# EAGLE board xr_vco_components_route1 (EAGLE 7.3.0)
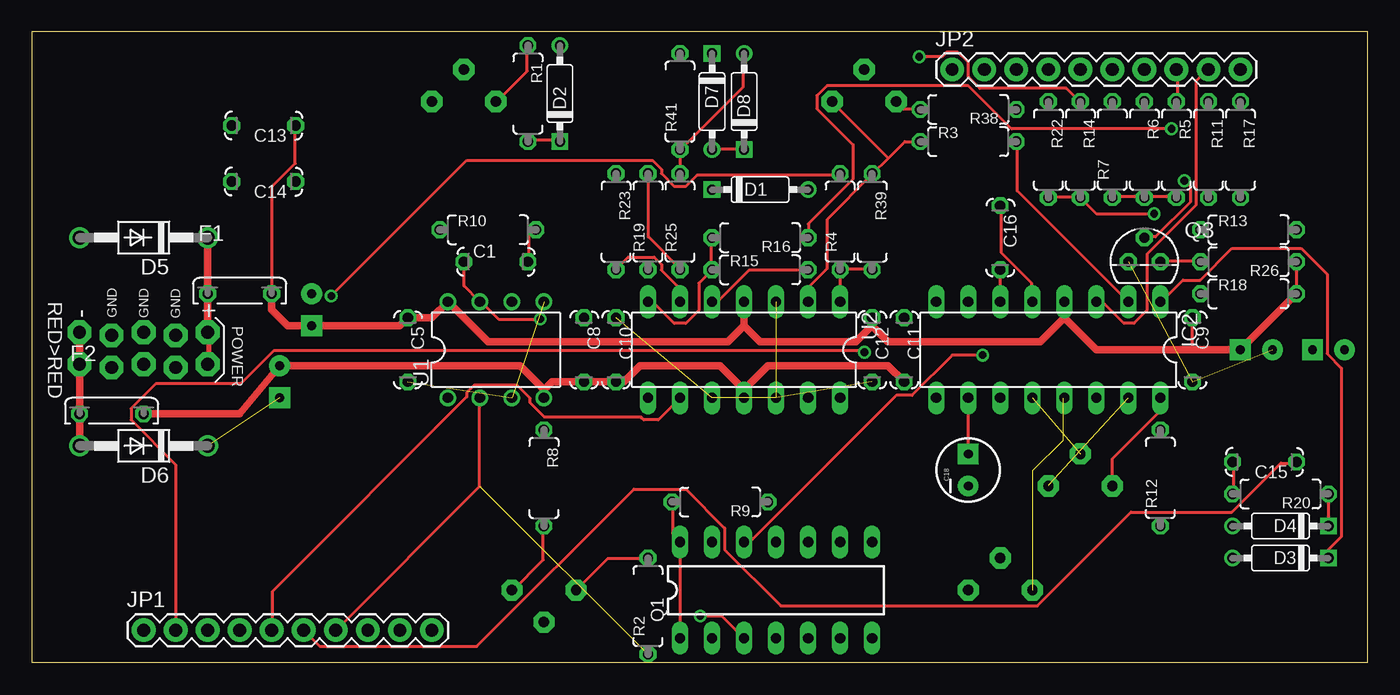
[diagram p0: board, top side]
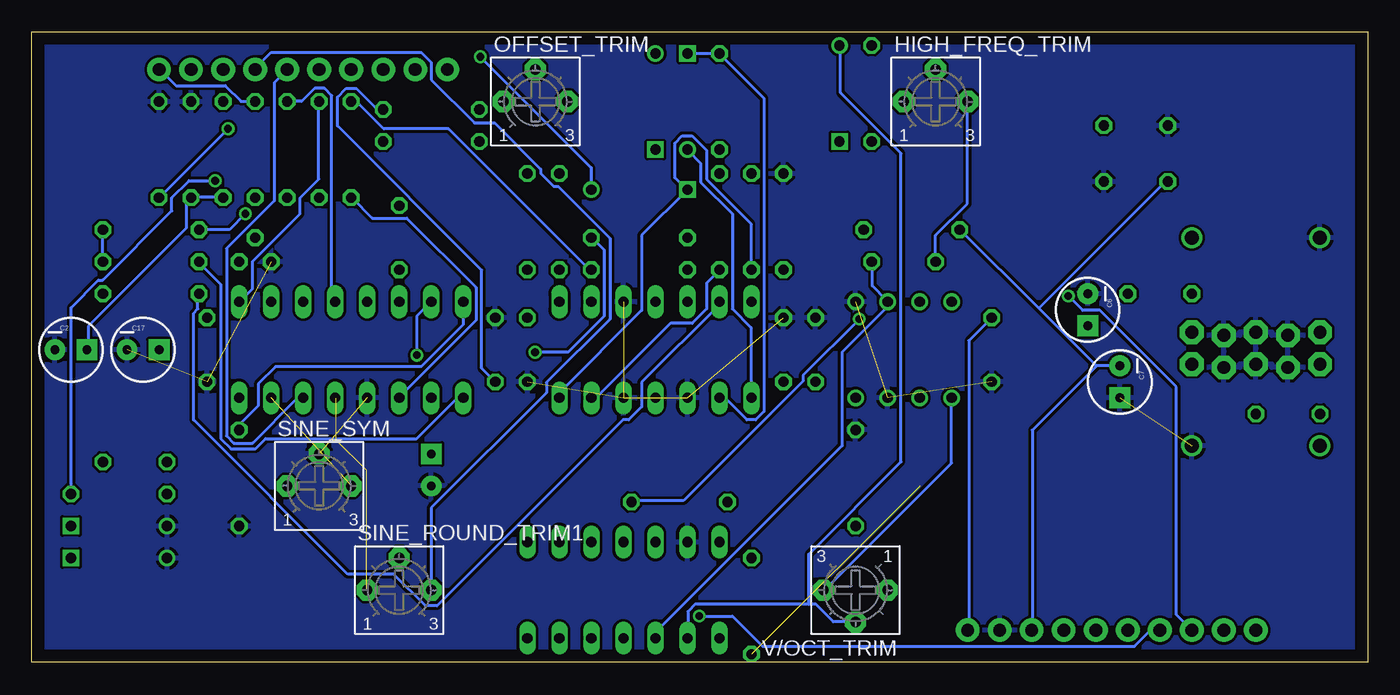
[diagram p1: board, bottom side, seen from below]

Size 106 x 50 mm. Coordinates in mm from the lower left corner, seen from the top.
Outline: 0,0 106,0 106,50 0,50 0,0
Copper layers (1*16): Top 0.035mm / dielectric 1.5mm / Bottom 0.035mm
Design rules "default": minimum track width 10mil, minimum drill 24mil, track to track 8mil, track to pad 8mil, pad to pad 8mil, via to via 8mil, smd to smd 8mil, copper to edge 40mil, drill to drill 8mil, minimum pad ring 10mil, minimum via ring 8mil, stop-mask expansion 4mil, vias tented up to drill 0mil, thermal gap 10mil
Net classes: 1 power: width 0.406 mm; 2 ground: width 0.305 mm

## Footprints (pad centres in the part's own frame; a part is rotated, then mirrored left to right if it is on the bottom)
C050-024X044 = drill 0.813 octagon: 1 -2.54,0; 2 2.54,0
CPOL-RADIAL-10UF-25V = drill 0.7 pad 1.651 square: 1 1.27,0 | drill 0.7 pad 1.651: 2 -1.27,0
DO35-7 = drill 0.813: A 3.81,0 | drill 0.813 square: C -3.81,0
DO41-10 = drill 1.118: A 5.08,0; C -5.08,0
C050H075X075 = drill 0.813 octagon: 1 -2.54,0; 2 2.54,0
BOURNS_3362P_TRIMMER = drill 0.813 pad 1.676 octagon: 1 -2.54,0; 2 0,2.54; 3 2.54,0
DIL16 = drill 0.813 long: 1 -8.89,-3.81; 2 -6.35,-3.81; 3 -3.81,-3.81; 4 -1.27,-3.81; 5 1.27,-3.81; 6 3.81,-3.81; 7 6.35,-3.81; 8 8.89,-3.81; 9 8.89,3.81; 10 6.35,3.81; 11 3.81,3.81; 12 1.27,3.81; 13 -1.27,3.81; 14 -3.81,3.81; 15 -6.35,3.81; 16 -8.89,3.81
1X10 = drill 1.016 pad 1.88: 1 0,0; 2 2.54,0; 3 5.08,0; 4 7.62,0; 5 10.16,0; 6 12.7,0; 7 15.24,0; 8 17.78,0; 9 20.32,0; 10 22.86,0
DIL14 = drill 0.813 long: 1 -7.62,-3.81; 2 -5.08,-3.81; 3 -2.54,-3.81; 4 0,-3.81; 5 2.54,-3.81; 6 5.08,-3.81; 7 7.62,-3.81; 8 7.62,3.81; 9 5.08,3.81; 10 2.54,3.81; 11 0,3.81; 12 -2.54,3.81; 13 -5.08,3.81; 14 -7.62,3.81
TO92D = drill 0.813 octagon: B 0,1.905; C 1.27,0; E -1.27,0
7MM_RESISTOR = drill 0.813 octagon: 1 -3.81,0; 2 3.81,0
EURO_PWR_HEADER_LOCK = drill 1.016 pad 1.88 octagon: GND1 -2.54,1.143; GND2 -2.54,-1.397; GND3 0,1.397; GND4 0,-1.143; GND5 2.54,1.143; GND6 2.54,-1.397; NEG1 -5.08,1.397; NEG2 -5.08,-1.143; POS1 5.08,1.397; POS2 5.08,-1.143
DIL08 = drill 0.813 pad 1.27: 1 -3.81,-3.81; 2 -1.27,-3.81; 3 1.27,-3.81; 4 3.81,-3.81; 5 3.81,3.81; 6 1.27,3.81; 7 -1.27,3.81; 8 -3.81,3.81

## Placement (x,y rotation side)
C1  100pf  [C050-024X044]  36.83,31.75 0 top
C2  10uf  [CPOL-RADIAL-10UF-25V]  102.87,24.77 0 bottom
C5  100n  [C050-024X044]  29.84,24.77 270 top
C6  10uf  [CPOL-RADIAL-10UF-25V]  22.23,27.94 270 bottom
C7  10uf  [CPOL-RADIAL-10UF-25V]  19.68,22.23 270 bottom
C8  100n  [C050-024X044]  43.81,24.77 270 top
C9  100n  [C050-024X044]  92.08,24.77 270 top
C10  100n  [C050-024X044]  46.35,24.77 270 top
C11  100n  [C050-024X044]  69.22,24.77 270 top
C12  100n  [C050-024X044]  66.67,24.77 270 top
C13  100n  [C050-024X044]  18.41,42.55 180 top
C14  100n  [C050-024X044]  18.41,38.1 180 top
C15  470pf  [C050-024X044]  97.79,15.88 180 top
C16  0.047uf  [C050-024X044]  76.83,33.66 270 top
C17  4.7uf  [CPOL-RADIAL-10UF-25V]  97.16,24.77 0 bottom
C18  4.7uf  [CPOL-RADIAL-10UF-25V]  74.3,15.24 90 top
D1  1N4148  [DO35-7]  57.78,37.47 0 top
D2  1N4148  [DO35-7]  41.91,45.09 90 top
D3  1N4148  [DO35-7]  99.06,8.26 180 top
D4  1N4148  [DO35-7]  99.06,10.79 180 top
D5  1N4001  [DO41-10]  8.89,33.66 180 top
D6  1N4001  [DO41-10]  8.89,17.14 180 top
D7  1N4148  [DO35-7]  53.98,44.45 270 top
D8  1N4148  [DO35-7]  56.52,44.45 90 top
F1  FUSE  [C050H075X075]  16.51,29.21 0 top
F2  FUSE  [C050H075X075]  6.35,19.68 0 top
HIGH_FREQ_TRIM  1M  [BOURNS_3362P_TRIMMER]  34.29,44.45 0 bottom
IC2  [DIL16]  80.64,24.77 180 top
JP1  M10"  [1X10]  8.89,2.54 0 top
JP2  M10"  [1X10]  73.03,46.99 0 top
OFFSET_TRIM  50k  [BOURNS_3362P_TRIMMER]  66.04,44.45 0 bottom
Q1  THAT300P  [DIL14]  59.05,5.71 0 top
Q3  2N3904  [TO92D]  88.27,31.75 0 top
R1  47k  [7MM_RESISTOR]  39.37,45.09 270 top
R2  2k  [7MM_RESISTOR]  48.9,4.45 90 top
R3  82k  [7MM_RESISTOR]  74.3,41.27 0 top
R4  1k  [7MM_RESISTOR]  64.14,34.92 90 top
R5  11k  [7MM_RESISTOR]  90.81,40.64 270 top
R6  20k  [7MM_RESISTOR]  88.27,40.64 270 top
R7  5.6k  [7MM_RESISTOR]  85.72,40.64 90 top
R8  390R  [7MM_RESISTOR]  40.64,14.61 270 top
R9  4.7k  [7MM_RESISTOR]  54.61,12.7 180 top
R10  1.2m  [7MM_RESISTOR]  36.2,34.29 0 top
R11  5.6k  [7MM_RESISTOR]  93.34,40.64 270 top
R12  1k  [7MM_RESISTOR]  89.53,14.61 90 top
R13  4.7k  [7MM_RESISTOR]  96.52,34.29 0 top
R14  10k  [7MM_RESISTOR]  83.19,40.64 270 top
R15  2.2M  [7MM_RESISTOR]  57.78,31.11 0 top
R16  3k  [7MM_RESISTOR]  57.78,33.66 180 top
R17  1.8k  [7MM_RESISTOR]  95.89,40.64 270 top
R18  10k  [7MM_RESISTOR]  96.52,29.21 0 top
R19  10k  [7MM_RESISTOR]  48.9,34.92 90 top
R20  100k  [7MM_RESISTOR]  99.06,13.34 180 top
R22  2.2k  [7MM_RESISTOR]  80.64,40.64 270 top
R23  10k  [7MM_RESISTOR]  46.35,34.92 270 top
R25  10k  [7MM_RESISTOR]  51.44,34.92 90 top
R26  4.7k  [7MM_RESISTOR]  96.52,31.75 180 top
R38  150k  [7MM_RESISTOR]  74.3,43.81 180 top
R39  200k  [7MM_RESISTOR]  66.67,34.92 270 top
R41  220k  [7MM_RESISTOR]  51.44,44.45 90 top
SINE_ROUND_TRIM1  500 Ohm  [BOURNS_3362P_TRIMMER]  76.83,5.71 0 bottom
SINE_SYM  25k  [BOURNS_3362P_TRIMMER]  83.19,13.97 0 bottom
SV1  EURO_POWER_HEADERLOCK_PADS  [EURO_PWR_HEADER_LOCK]  8.89,24.77 0 top
U1  LF442N  [DIL08]  36.83,24.77 0 top
U2  TL074P  [DIL14]  56.52,24.77 180 top
V/OCT_TRIM  100R  [BOURNS_3362P_TRIMMER]  40.64,5.71 180 bottom

## Library data of the parts
C1 C5 C8-C16 F1 F2 = TomW
C2 C6 C7 C17 C18 = SparkFun-Passives
D1-D4 D7 D8 HIGH_FREQ_TRIM OFFSET_TRIM R1-R20 R22 R23 R25 R26 R38 R39 R41 SINE_ROUND_TRIM1 SINE_SYM SV1 V/OCT_TRIM = MusicThingModular
D5 D6 = diode
IC2 = exar; OC_FARNELL: unknown; OC_NEWARK: unknown
JP1 JP2 = SparkFun-Connectors
Q1 = that-corp
Q3 = transistor-small-signal
U1 U2 = linear

## Nets
+12V: C5.1 C6.1 C9.1 C12.1 C13.1 C17.1 F1.2 IC2.4 JP1.10 R7.2 R13.2 R18.2 R26.1 U1.8 U2.4
+12V_INLET [power]: D5.C F1.1 SV1.POS1 SV1.POS2
-12V: C7.2 C8.2 C10.2 C11.2 C14.2 F2.2 JP1.8 R10.1 R38.1 U1.4 U2.11
-12V_INLET [power]: D6.A F2.1 SV1.NEG1 SV1.NEG2
CATH_D4: D1.C R19.1 U2.14
GND: C2.2 C5.2 C6.2 C7.1 C8.1 C9.2 C10.1 C11.1 C12.2 C13.2 C14.1 C17.2 C18.2 D3.A D4.A D5.A D6.C IC2.12 JP1.9 Q1.13 Q3.E R8.1 R11.1 R12.1 R17.1 R23.1 SINE_SYM.2 SV1.GND1 SV1.GND2 SV1.GND3 SV1.GND4 SV1.GND5 SV1.GND6 U1.3 U1.5 U2.3 U2.10 U2.12
LIN_FM_CV: C1.2 JP1.4 Q1.3 R10.2 U1.6
N$1: IC2.7 Q1.12
N$2: D2.C R1.2
N$3: HIGH_FREQ_TRIM.1 R1.1
N$5: IC2.2 R3.2
N$7: R2.2 U1.1 V/OCT_TRIM.3
N$8: OFFSET_TRIM.3 R3.1 R39.1 U2.2
N$9: R8.2 V/OCT_TRIM.1
N$10: D2.A Q1.2 V/OCT_TRIM.2
N$11: Q1.1 Q1.14 R9.2
N$12: OFFSET_TRIM.1 R38.2
N$13: R4.1 R39.2 U2.1
N$15: C1.1 HIGH_FREQ_TRIM.3 R9.1 U1.7
N$16: C2.1 R5.2 R6.2 R7.1 R11.2
N$17: IC2.16 SINE_SYM.1
N$20: IC2.13 SINE_ROUND_TRIM1.1
N$21: IC2.15 SINE_SYM.3
N$22: IC2.8 R12.2
N$23: R18.1 R23.2 U2.6
N$24: R15.1 R16.2 U2.7
N$25: R19.2 R25.1 U2.13
N$26: R15.2 R22.1 U2.5
N$27: D1.A D3.C IC2.1 R14.1
N$28: C15.2 R20.2
N$29: D4.C Q3.B R20.1
N$30: IC2.11 R13.1 R14.2 R22.2
N$31: IC2.9 Q3.C R26.2
N$32: C16.2 IC2.6
N$33: C16.1 IC2.5
N$34: C18.1 IC2.10
N$35: D7.A D8.C U2.8
N$36: D8.A R25.2 R41.1
PITCH_CV: JP1.7 R2.1 U1.2
SINE_TRI_OUT: JP1.3 R4.2
SKEW_IN: D7.C JP1.5 R41.2 U2.9
SQR_OUT: JP1.2 R16.1 R17.2
SW_1: JP2.10 R6.1
SW_2: IC2.3 JP2.9
SW_3: JP2.8 R5.1
SW_4: JP2.7 SINE_ROUND_TRIM1.3
SW_5: IC2.14 JP2.6
SYNC_IN: C15.1 JP1.6

## Tracks (layer width: path | path; a pad name or v marks a point on that pad's centre or on a via)
+12V
  Top 0.254: U2.4 56.58,28.57 56.58,28.23 56.52,27.94 | 92.01,24.77 92.01,27.2 C9.1 | C13.1 20.92,42.52 20.92,39.55 19.09,37.72 19.09,29.49 F1.2 | R26.1 100.36,31.66 100.36,29.49 R18.2
  Top 0.61: F1.2 19.05,27.94 20.32,26.67 C6.1 29.21,26.67 C5.1 31.75,27.3 U1.8 36.2,25.4 55.24,25.4 56.52,26.67 | 56.52,27.94 56.52,26.67 | 56.52,26.67 57.78,25.4 65.41,25.4 66.67,26.67 | 66.67,26.67 C12.1 | 66.67,26.67 67.94,25.4 80.01,25.4 81.92,27.3 | IC2.4 81.92,27.3 | 81.92,27.3 84.45,24.77 92.01,24.77 C17.1 R18.2
  Bottom 0.254: R7.2 85.72,44.46 84.58,44.46 83.55,45.49 82.75,45.49 82.18,44.92 82.18,28.8 81.95,28.57 IC2.4 | R13.2 100.36,34.29 100.36,31.77 R26.1 | C5.1 31.66,25.49 31.66,2.63 JP1.10
+12V_INLET
  Top 0.406: SV1.POS2 14.06,23.66 14.06,25.95 SV1.POS1
  Top 0.61: SV1.POS1 F1.1 D5.C
-12V
  Top 0.254: U2.11 56.58,21.03 56.58,21.37 56.52,21.59
  Top 0.61: F2.2 16.51,19.68 C7.2 38.73,23.5 40.64,21.59 | U1.4 40.64,21.59 | 40.64,21.59 41.27,22.23 C8.2 C10.2 46.99,22.23 48.26,23.5 54.61,23.5 56.52,21.59 58.42,23.5 67.94,23.5 C11.2
  Bottom 0.254: 21.6,23.55 19.77,23.55 C7.2 | 26.12,28.06 32.35,34.29 R10.1 | 26.12,28.06 21.6,23.55 | 26.12,28.06 16.12,38.06 15.89,38.06 C14.2 | R38.1 78.18,43.89 78.64,43.89 80.24,45.49 81.04,45.49 81.72,44.81 81.72,42.52 70.29,31.09 70.29,23.32 69.27,22.29 C11.2 | JP1.8 26.63,2.63 26.63,18.4 21.6,23.43 21.6,23.55
-12V_INLET
  Top 0.406: SV1.NEG2 3.89,23.66 3.81,23.66
  Top 0.61: SV1.NEG1 3.81,23.66 SV1.NEG2 F2.1 D6.A
CATH_D4
  Bottom 0.254: U2.14 64.12,21.03 64.12,21.37 57.61,27.89 57.61,33.83 D1.C 54.06,37.49 54.98,38.41 54.98,41.15 54.41,41.72 53.61,41.72 52.46,40.58 52.46,38.29 48.92,34.75 48.92,31.2 R19.1
GND  (10 unrouted)
  pour Bottom: -0.64,50.8 -0.64,-0.64 106.68,-0.64 106.68,0 106.68,50.8
LIN_FM_CV  (via drill 0.61)
  Top 0.254: R10.2 39.43,33.72 39.43,31.77 C1.2 | v53.03,3.66 54.75,3.66 56.46,1.94 Q1.3
  Bottom 0.254: Q1.3 56.46,1.94 56.46,2.4 41.72,17.14 41.72,24.57 38.18,28.12 38.18,28.57 U1.6 38.18,28.69 39.32,29.83 39.32,31.66 C1.2 | v53.03,3.66 50.41,3.66 48.01,1.26 18.52,1.26 17.26,2.52 16.57,2.52 JP1.4
N$1  (via drill 0.61)
  Top 0.254: v75.44,24.35 73.04,24.35 69.84,21.14 68.58,21.14 57.04,9.6 56.58,9.6 Q1.12
  Bottom 0.254: v75.44,24.35 75.44,27.43 IC2.7
N$2
  Top 0.254: R1.2 39.43,41.38 41.83,41.38 D2.C
N$3
  Top 0.254: R1.1 39.32,48.81 39.32,46.86 36.92,44.46 HIGH_FREQ_TRIM.1
N$5
  Top 0.254: R3.2 78.18,41.26 78.18,37.38 IC2.2
N$7
  Top 0.254: R2.2 48.81,8.23 45.72,8.23 43.2,5.71 V/OCT_TRIM.3
  Bottom 0.254: U1.1 33.03,20.92 33.03,15.77 43.09,5.71 V/OCT_TRIM.3
N$8
  Top 0.254: U2.2 61.61,28.57 61.61,29.72 63.09,31.2 63.09,35.09 66.64,38.63 R39.1 66.75,38.75 67.95,39.95 | 67.95,39.95 69.27,41.26 70.41,41.26 R3.1 | 67.95,39.95 63.55,44.35 OFFSET_TRIM.3
N$9
  Top 0.254: R8.2 40.58,10.74 40.58,8.12 38.18,5.71 V/OCT_TRIM.1
N$10
  Bottom 0.254: 44.35,4.57 43.78,4.57 42.41,3.2 40.69,3.2 V/OCT_TRIM.2 | 44.35,4.57 53.38,4.57 53.95,4 53.95,1.94 Q1.2 | 44.35,4.57 44.35,8.57 37.03,15.89 37.03,40.35 41.83,45.15 41.83,48.81 D2.A
N$11
  Top 0.254: Q1.1 Q1.14 51.44,9.6 50.86,10.17 50.86,12.69 R9.2
N$12
  Top 0.254: R38.2 70.41,43.89 69.04,43.89 68.58,44.35 OFFSET_TRIM.1
N$13
  Top 0.254: U2.1 64.12,28.57 64.12,31.09 R4.1 64.24,31.2 66.64,31.2 R39.2
N$15  (via drill 0.61)
  Top 0.254: C1.1 34.29,29.83 35.55,28.57 U1.7 35.66,28.57 37.03,27.2 v40.35,27.2
  Bottom 0.254: v40.35,27.2 44.81,22.75 44.81,22.29 54.29,12.8 58.41,12.8 R9.1 | C1.1 34.29,33.83 31.77,36.35 31.77,44.35 HIGH_FREQ_TRIM.3
N$16
  Top 0.254: R7.1 85.72,36.92 88.24,36.92 R6.2 88.35,36.92 90.75,36.92 R5.2
  Bottom 0.254: R5.2 90.87,36.92 93.27,36.92 R11.2 93.38,36.8 93.73,36.46 93.73,34.4 101.5,26.63 101.5,24.8 C2.1
N$17
  Top 0.254: SINE_SYM.1 85.72,16.12 89.5,19.89 89.5,20.92 IC2.16
N$20  (3 unrouted)
  Top 0.254: 81.84,20.92 IC2.13 | 79.44,5.71 SINE_ROUND_TRIM1.1
N$21  (2 unrouted)
N$22
  Bottom 0.254: R12.2 89.5,18.52 89.5,18.86 88.01,20.34 88.01,22.06 86.64,23.43 75.09,23.43 71.78,26.75 71.78,28.57 IC2.8
N$23
  Top 0.254: U2.6 51.44,29.6 49.95,31.09 49.95,31.55 49.38,32.12 47.32,32.12 46.41,31.2 R23.2
  Bottom 0.254: U2.6 51.44,28.35 57.61,22.17 57.61,20.23 58.64,19.2 59.09,19.2 73.84,4.46 74.75,4.46 77.27,6.97 80.92,6.97 93.15,19.2 93.15,27.66 92.81,28 92.81,29.15 R18.1
N$24
  Top 0.254: U2.7 49.26,28.57 50.98,26.86 51.89,26.86 52.92,27.89 52.92,30.06 R15.1 53.95,31.2 53.95,33.6 R16.2
N$25
  Top 0.254: R19.2 48.92,38.63 48.92,33.72 51.44,31.2 R25.1
  Bottom 0.254: U2.13 61.49,21.03 61.15,21.03 55.32,26.86 53.61,26.86 52.46,28 52.46,30.06 51.44,31.09 R25.1
N$26
  Top 0.254: U2.5 54.41,28.57 56.92,31.09 61.49,31.09 R15.2
  Bottom 0.254: R22.1 80.58,44.35 80.12,44.35 78.07,42.29 72.92,42.29 61.84,31.2 61.61,31.2 R15.2
N$27  (via drill 0.61)
  Top 0.254: v70.41,48.01 72.24,48.01 72.58,48.35 73.5,48.35 74.3,47.55 74.3,46.41 75.21,45.49 82.07,45.49 83.1,44.46 R14.1 | D3.C 102.87,8.91 103.9,9.94 103.9,23.32 102.76,24.46 102.76,30.75 100.7,32.8 95.21,32.8 92.7,30.29 91.33,30.29 89.61,28.57 IC2.1
  Bottom 0.254: v70.41,48.01 61.61,39.2 61.61,37.49 D1.A | R14.1 83.21,44.35 83.21,38.29 84.7,36.8 84.7,35.55 88.47,31.77 88.47,29.6 89.5,28.57 IC2.1
N$28
  Top 0.254: R20.2 95.33,13.37 95.33,15.77 C15.2
N$29  (via drill 0.61)
  Top 0.254: 88.24,33.72 Q3.B 88.35,33.72 89.15,33.72 91.9,36.46 91.9,37.72 v91.44,38.18 | R20.1 D4.C
  Bottom 0.254: v91.44,38.18 93.5,38.18 94.87,36.8 94.87,35.78 100.36,30.29 100.7,30.29 102.87,28.12 R20.1
N$30  (via drill 0.61)
  Top 0.254: R22.2 80.7,36.92 83.1,36.92 R14.2 84.47,35.55 v89.04,35.55
  Bottom 0.254: IC2.11 76.81,21.03 70.75,27.09 70.75,29.72 76.24,35.2 78.98,35.2 80.58,36.8 R22.2 | R13.1 90.3,34.29 v89.04,35.55
N$31
  Top 0.254: Q3.C 89.61,31.77 92.7,31.77 R26.2
  Bottom 0.254: IC2.9 71.78,20.92 72.24,20.92 75.44,17.72 87.44,17.72 88.24,16.92 90.18,16.92 90.98,17.72 90.98,29.95 92.7,31.66 R26.2
N$32
  Top 0.254: IC2.6 76.81,28.57 76.81,31.09 C16.2
N$33
  Top 0.254: C16.1 76.92,36.12 76.92,32.46 79.32,30.06 79.32,28.57 IC2.5
N$34
  Top 0.254: C18.1 IC2.10
N$35
  Top 0.254: D8.C 56.46,40.69 54.06,40.69 D7.A
  Bottom 0.254: U2.8 48.92,21.03 48.92,26.52 50.41,28 50.41,35.55 52.92,38.06 52.92,39.55 53.95,40.58 D7.A
N$36
  Top 0.254: R25.2 R41.1 51.55,40.69 56.46,45.61 56.46,48.23 D8.A
PITCH_CV  (1 unrouted)
  Top 0.254: U1.2 35.55,20.92 35.55,13.95 24.23,2.63 JP1.7
SINE_TRI_OUT  (via drill 0.61)
  Top 0.254: v23.77,29.03 34.52,39.78 49.26,39.78 49.95,39.09 49.95,38.75 50.98,37.72 51.89,37.72 52.81,38.63 64.12,38.63 R4.2
  Bottom 0.254: v23.77,29.03 22.63,27.89 21.26,27.89 15.2,21.83 15.2,3.77 JP1.3
SKEW_IN
  Top 0.254: JP1.5 19.09,2.63 19.09,5.6 34.52,21.03 34.52,21.37 35.09,21.95 38.52,21.95 39.55,20.92 39.55,20.57 40.69,19.43 48.35,19.43 48.58,19.2 49.72,19.2 51.44,20.92 U2.9
  Bottom 0.254: U2.9 51.44,20.92 50.98,20.92 49.26,19.2 48.58,19.2 47.89,19.89 47.89,44.69 51.44,48.23 R41.2 51.55,48.23 53.95,48.23 D7.C
SQR_OUT  (via drill 0.61)
  Top 0.254: v90.41,42.29 77.72,42.29 74.3,45.72 63.09,45.72 62.29,44.92 62.29,43.89 65.15,41.03 65.15,38.29 61.61,34.75 61.61,33.72 R16.1 | JP1.2 11.43,15.66 7.89,19.2 7.89,20.12 9.83,22.06 16.57,22.06 19.2,24.69 65.95,24.69 v66.06,24.57
  Bottom 0.254: v90.41,42.29 95.78,36.92 R17.2 | v66.06,24.57 63.44,24.57 60.58,27.43 60.58,32.69 61.49,33.6 R16.1
SW_1
  Bottom 0.254: R6.1 88.35,44.46 89.38,44.46 90.64,45.72 94.53,45.72 95.78,46.98 JP2.10
SW_2
  Top 0.254: IC2.3 84.92,28.57 86.64,26.86 87.44,26.86 88.47,27.89 88.47,32.35 92.35,36.23 92.35,46.06 93.27,46.98 JP2.9
SW_3
  Top 0.254: R5.1 90.87,44.46 90.87,46.98 JP2.8
SW_4
  Bottom 0.254: SINE_ROUND_TRIM1.3 74.3,12.23 65.15,21.37 65.15,22.17 60.12,27.2 60.12,33.6 64.24,37.72 64.58,37.72 65.61,38.75 65.61,39.09 69.27,42.75 70.87,42.75 74.3,46.18 74.3,47.55 75.09,48.35 86.98,48.35 88.24,47.09 JP2.7
SW_5
  Bottom 0.254: IC2.14 84.47,20.92 84.92,20.92 88.47,17.37 89.95,17.37 90.53,17.95 90.53,32.8 86.75,36.58 86.75,45.95 85.72,46.98 JP2.6
SYNC_IN
  Top 0.254: C15.1 100.24,15.77 99.1,15.77 95.21,11.89 87.21,11.89 79.78,4.46 59.44,4.46 54.98,8.91 54.98,10.63 51.89,13.72 47.78,13.72 35.32,1.26 22.86,1.26 21.6,2.52 JP1.6